# Altium PCB main.PcbDoc
Units mil, origin at the board's own origin, x right, y up, seen from the top; angles counter-clockwise.
Board outline 1186.89 x 856.86 mil, 2 copper layers (Top Layer, Bottom Layer); 16 components, 10 nets, 58 pads, 8 vias.
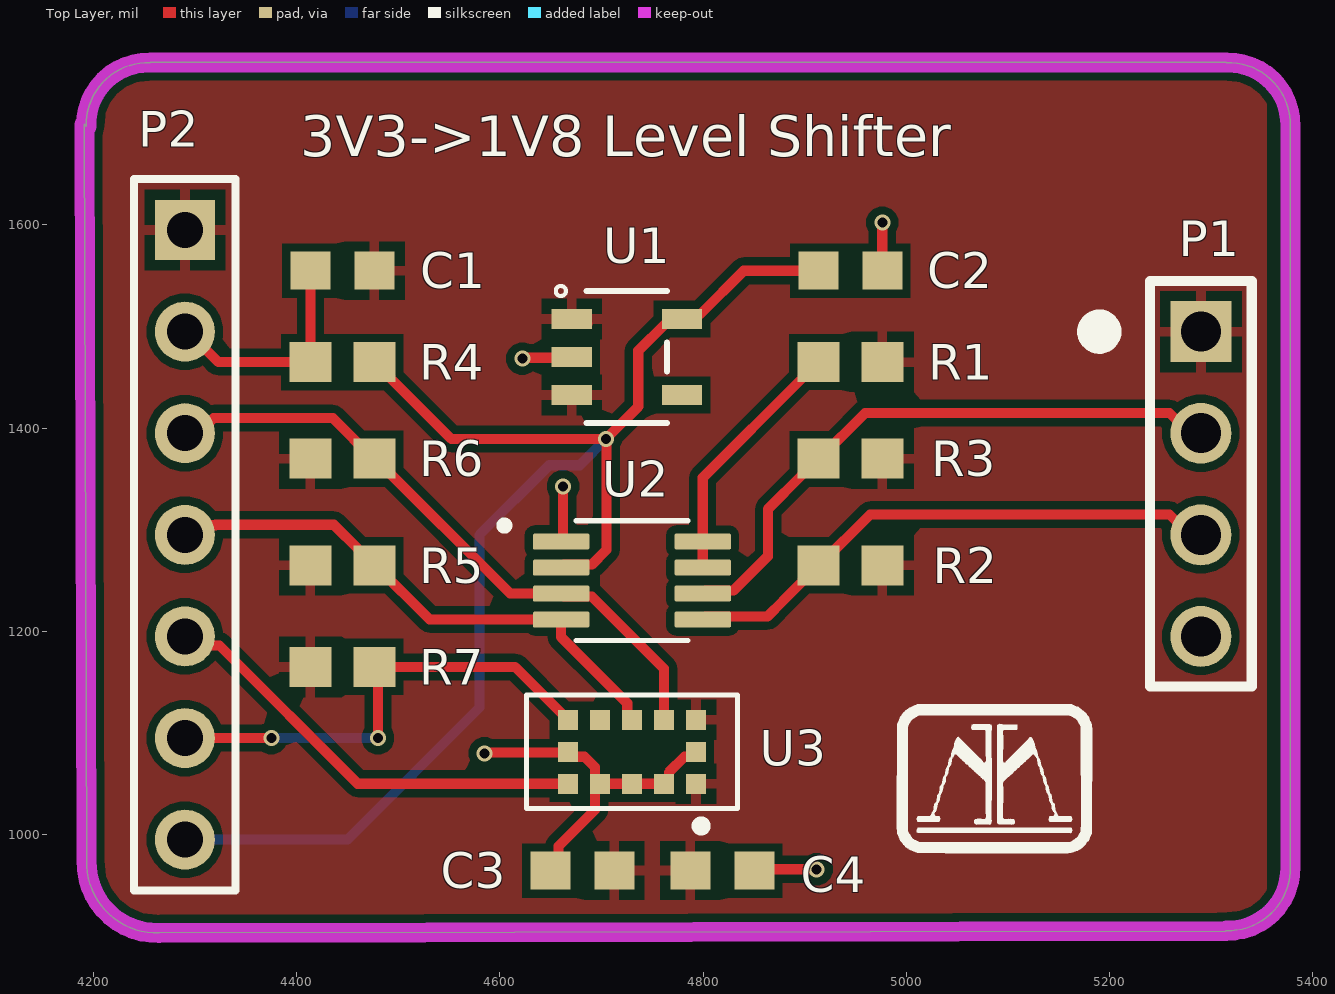
[diagram p0: Top Layer view]
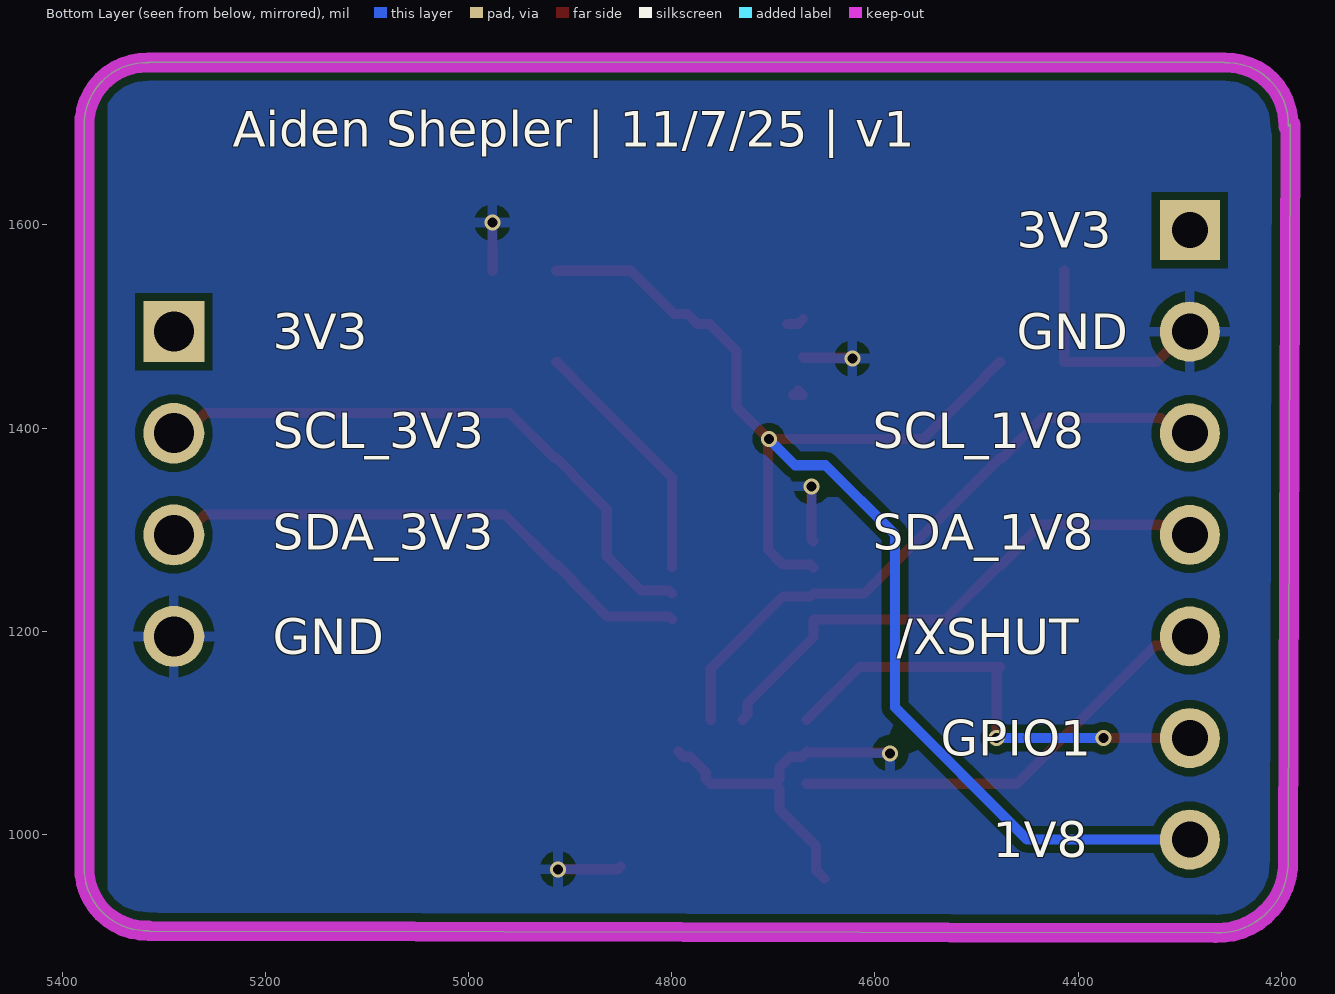
[diagram p1: Bottom Layer view, seen from below]

## Layer stack, top to bottom
Top Solder: solder mask 0.4, Solder Resist, Dk 3.5
Top Layer: signal copper 1.4
Dielectric 1: dielectric 12.6, FR-4, Dk 4.8
Bottom Layer: signal copper 1.4
Bottom Solder: solder mask 0.4, Solder Resist, Dk 3.5

## Board outline
4193.24,974.71 4191.06,1699.06 4192.91,1696.97 cw(c4253.94,1698.82) 4255.9,1759.84 4255.94,1760 5314.8,1760 5315.08,1759.85 cw(c5316.93,1698.82) 5377.95,1696.85 5377.95,968.5 5377.96,968.38 cw(c5316.93,966.54) 5314.96,905.51 5314.45,905 4264.68,903.14 cw(c4262.58,972.47)

## Design rules (kind name [scope] priority, off if disabled: settings)
Clearance [All] p1: gap=7.87 ignorepadtopadclearanceinfootprint=FALSE
HoleSize [All] p1: absolutevalues=TRUE maxlimit=100 minlimit=9.84 maxpercent=80.000 minpercent=20.000
PolygonConnect [All] p1: connectstyle=Relief reliefconductorwidth=10 reliefentries=4 polygonreliefangle="90 Angle" airgapwidth=10
RoutingVias [All] p1: holewidth=28 width=50 viastyle="Through Hole" minholewidth=28 minwidth=50 maxholewidth=28 maxwidth=50
SolderMaskExpansion [All] p1: expansion=4 istentingtop=FALSE
SupplyNets "Schematic Supply Nets_2" [InNet('GND')] p1: voltage=0.000
SupplyNets "Schematic Supply Nets_1" [InNet('3V3')] p2: voltage=0.000
SupplyNets "Schematic Supply Nets" [InNet('1V8')] p3: voltage=0.000
Width [All] p1: maxlimit=10 minlimit=10 preferedwidth=10
29 further rules are at their usual default settings.

## Components (designator, comment, footprint, x,y, rotation, side; value= is the part's Value field where it differs from the comment)
C1 "Cap" CAPC0603 4445,1555 r180 top value=100nF
C2 "Cap" CAPC0603 4945,1555 r0 top value=100nF
C3 "Cap" CAPC0603 4681.1,964.57 r180 top value=100nF
C4 "Cap" CAPC0603 4818.9,964.57 r0 top value=4.7uF
P1 "1x4 0.1in Header" "1x4 0.1in Header" 5290,1495 r0 top
P2 "Header 7" HDR1X7 4290,1595 r270 top
R1 "Res" RES0603 4945,1465 r180 top value=200k
R2 "Res" RES0603 4945,1265 r180 top value=10k
R3 "Res" RES0603 4945,1370 r180 top value=10k
R4 "Res" RES0603 4445,1465 r180 top value=300k
R5 "Res" RES0603 4445,1265 r0 top value=10k
R6 "Res" RES0603 4445,1370 r0 top value=10k
R7 "Res" RES0603 4445,1165 r0 top value=10k
U1 "ADPL40502AUJZ-1.8-R7" TSOT-23-5_UJ-5_ADI 4725,1470 r0 top
U2 "PCA9306DCTR" SOP65P400X130-8N 4730,1250 r0 top
U3 "VL53L1CXV0FY/1" "LGA-12 (VL53L1CXV0FY/1)" 4730,1081.5 r270 top

## Footprints (in the part's own frame and the unit in brackets; to place one, negate y for a bottom-side part, rotate by r counter-clockwise, add the part's x,y. Pads: shape width x height; smd on the part's side, far side on the other; paste and mask are expansions set on the pad)
"1x4 0.1in Header" [mil]
  rect 60x60 hole 39.37: 1(0,0)
  round 60 hole 39.37: 2(0,-100) 3(0,-200) 4(0,-300)
  silkscreen extent -110,-349 50,50
CAPC0603 [mm] "Chip Capacitor, 2-Leads, Body 1.60x0.80mm, IPC Medium Density"
  rect 1x0.95 smd: 1(-0.8,0) 2(0.8,0)
  body extent -0.88,-0.48 0.87,0.48, height 0.8
HDR1X7 [mm] "Connector; Header; 7 Position"
  rect 1.5x1.5 hole 0.9: 1(0,0)
  round 1.5 hole 0.9: 2(2.54,0) 3(5.08,0) 4(7.62,0) 5(10.16,0) 6(12.7,0) 7(15.24,0)
  silkscreen extent -1.27,-1.27 16.51,1.27
"LGA-12 (VL53L1CXV0FY/1)" [mm] "12 pin LGA for 4.9 x 2.5 x 1.56 mm package"
  rect 0.5x0.5 smd: 1(0.8,1.6) 2(0.8,0.8) 3(0.8,0) 4(0.8,-0.8) 5(0.8,-1.6) 6(0,-1.6) 7(-0.8,-1.6) 8(-0.8,-0.8) 9(-0.8,0) 10(-0.8,0.8) 11(-0.8,1.6) 12(0,1.6)
  silkscreen extent -1.42,-2.64 1.97,2.64, body extent -1.25,-2.45 1.25,2.45, height 1.6
RES0603 [mm] "Chip Resistor, 2-Leads, Body 1.60x0.80mm, IPC Medium Density"
  rect 1.05x1 smd: 1(-0.8,0) 2(0.8,0)
  body extent -0.88,-0.48 0.87,0.47, height 0.8
SOP65P400X130-8N [mm]
  rrect25% 1.42x0.4 smd: 1(-1.77,0.975) 2(-1.77,0.325) 3(-1.77,-0.325) 4(-1.77,-0.975) 5(1.77,-0.975) 6(1.77,-0.325) 7(1.77,0.325) 8(1.77,0.975)
  silkscreen extent -3.29,-1.5 1.4,1.5, body extent -2,-1.47 2,1.47, height 1.3
TSOT-23-5_UJ-5_ADI [mil] "SOT23_5, Thin"
  rect 39.5x20 smd paste+0 mask+0: 1(-54.25,37.4) 2(-54.25,0) 3(-54.25,-37.4) 4(54.25,-37.4) 5(54.25,37.4)
  silkscreen extent -70,-65 40,70, body extent -60,-60 60,60, height 39

## Part data
C1 C2 C3 C4: Supplier Part Number 1=1276-1000-1-ND, Supplier 1=Digi-Key
P2: "Header, 7-Pin", LatestRevisionDate=17-Jul-2002, LatestRevisionNote="Re-released for DXP Platform.", Publisher="Altium Limited"
R1 R2 R3 R4 R5 R6 R7: "SMD, RES0603", Supplier Part Number 1=RMCF0603JT10K0CT-ND, Supplier 1=Digi-Key
U1: "Low Noise, 200mA, CMOS Linear Regulator (LDO)", Manufacturer_Name="Analog Devices Inc", Copyright="Copyright (C) 2025 Ultra Librarian. All rights reserved.", Manufacturer_Part_Number=ADPL40502AUJZ-1.8-R7, RefDes=RefDes, Type=Type
U2: "2-bit bidirectional 400-kHz I2C/SMBus voltage level translator", Package="SSOP-8 Texas Instruments", Check_prices=https://www.snapeda.com/parts/PCA9306DCTR/Texas+Instruments/view-part/?ref=eda, MF="Texas Instruments", MP=PCA9306DCTR, SnapEDA_Link=https://www.snapeda.com/parts/PCA9306DCTR/Texas+Instruments/view-part/?ref=snap
U3: "ToF Optical Sensor 157.480 (4m) I²C Output from STMelectronics", Package="LGA-12 STMicroelectronics", Availability="In Stock", Check_prices=https://www.snapeda.com/parts/VL53L1CXV0FY/1/STMicroelectronics/view-part/?ref=eda, MF=STMicroelectronics, MP=VL53L1CXV0FY/1, Price=None, Purchase-URL=https://pricing.snapeda.com/search/part/VL53L1CXV0FY/1/?ref=eda, SnapEDA_Link=https://www.snapeda.com/parts/VL53L1CXV0FY/1/STMicroelectronics/view-part/?ref=snap

## Via types
v1: diameter 15.75, hole 9.84, Top Layer to Bottom Layer, 8 vias

## Nets (pads, with @x,y where several pads share a name; then routed paths per layer and width w, separated by ;. In a path a pad name is that pad's centre, name@x,y a point inside that pad or via, vN(x,y) a via of type N, cw(c..) or ccw(c..) an arc to the next point about the centre after c; other vN are vias at no path point)
1V8: C2.1 P2.7 R4.1 U1.5 U2.2 | length 1408.2
  Top Layer w10: R4.1 4477.48,1465 4492.17,1450.31 4492.17,1449.33 4552.21,1389.29 v1(4704.27,1389.29) ; U2.2 4663.19,1265.67 4690.48,1265.67 4705,1280.19 4705,1388.56 v1(4704.27,1389.29) ; C2.1 4840,1555 4797.4,1512.4 4784.25,1512.4 4774.25,1502.4 4762.44,1502.4 4736.22,1476.19 4736.22,1421.23 v1(4704.27,1389.29)
  Bottom Layer w10: P2.7 4450,995 4580,1125 4580,1295 4648.58,1363.58 4678.56,1363.58 v1(4704.27,1389.29)
3V3: C1.1 C3.1 C4.1 P1.1 P2.1 R1.1 R2.1 R3.1 R5.1 R6.1 R7.1 U1.1 U1.3 U3.1 U3.11 | length 34.4
  Top Layer w10: U1.1 4675.75,1502.4 U1.1@4686.3,1502.4 ; U1.3@4675.75,1437.6 U1.3 U1.3@4680.5,1432.6
GND: C1.2 C2.2 C3.2 C4.2 P1.4 P2.2 R4.2 U1.2 U2.1 U3.2 U3.3 U3.4 U3.6 U3.12 | length 795.2
  Top Layer w10: P2.2 4292.97,1495 4322.97,1465 R4.2 C1.2 ; v1(4585,1080) 4585.75,1080.75 4666.26,1080.75 U3.6 4671.85,1076.65 4683.35,1076.65 4693.66,1066.34 4693.66,1054.84 U3.4 ; v1(4622.05,1468.5) 4622.8,1469.25 4670,1469.25 U1.2 ; C3.2@4649.61,956.69 C3.2@4657.76,964.85 ; C3.2@4657.76,968.79 4657.76,988.47 4693.66,1024.37 4693.66,1045.16 U3.4 ; U2.1 4662.17,1290.24 v1(4662.17,1342.83) ; U3.12 4788.15,1076.65 4781.75,1076.65 4766.34,1061.24 4766.34,1054.84 U3.2 U3.3 U3.4 ; C4.2@4850.39,968.5 4853.07,965.83 v1(4911.77,965.83) ; v1(4976.38,1602.36) 4976.38,1555.12 C2.2
GPIO1: P2.6 R7.2 U3.7 | length 473.5
  Top Layer w10: P2.6 v1(4375,1095) ; v1(4480,1095) 4480,1161.5 R7.2 4615,1165 U3.7
  Bottom Layer w10: v1(4375,1095) v1(4480,1095)
NetR1_2: R1.2 U2.7 U2.8 | length 249.9
  Top Layer w10: U2.7 U2.8 4799.69,1351.18 4897.83,1449.33 4897.83,1450.31 4912.52,1465 R1.2
SCL_1V8: P2.3 R6.2 U2.3 U3.10 | length 630.2
  Top Layer w10: P2.3 4303.27,1395 4318.27,1410 4435.51,1410 4475.51,1370 R6.2 4477.48,1370 4610.28,1237.2 U2.3 4663.19,1234.33 4690.48,1234.33 4761.5,1163.31 U3.10
SCL_3V3: P1.2 R3.2 U2.6 | length 600.6
  Top Layer w10: U2.6 4802.56,1240.08 4829.85,1240.08 4863.77,1274 4863.77,1320.26 4897.83,1354.33 4897.83,1355.31 4912.52,1370 R3.2 4914.49,1370 4959.49,1415 5259.14,1415 5279.64,1394.51 P1.2@5290.49,1394.51
SDA_1V8: P2.4 R5.2 U2.4 U3.9 | length 541.2
  Top Layer w10: P2.4 4299.39,1304.39 4319.77,1304.39 4320.39,1305 4436.5,1305 4460.83,1280.67 4460.83,1279.69 4475.51,1265 R5.2 4477.48,1265 4530.87,1211.61 U2.4 4660.31,1194.29 4725.36,1129.25 4725.36,1117.63 U3.9
SDA_3V3: P1.3 R2.2 U2.5 | length 545
  Top Layer w10: U2.5 4802.56,1214.49 4863.31,1214.49 4879.18,1230.36 4879.18,1230.67 4897.83,1249.33 4897.83,1250.31 4912.52,1265 R2.2 4914.49,1265 4964.49,1315 5259.14,1315 5281.14,1293 P1.3@5292,1293
X\S\H\U\T\: P2.5 U3.5 | length 437.1
  Top Layer w10: P2.5 4298.99,1186.01 4323.99,1186.01 4460,1050 U3.5
pads on no net: U1.4 U3.8

## Polygon pours and split planes (outlines as drawn)
3V3 on Top Layer "3v3" (solid, pour order 1): 4195,905 5355,905 5355,1760 4195,1760
GND on Bottom Layer "GND" (solid, pour order 2): 4195,905 5355,905 5355,1760 4195,1760

## Keep-outs
Keep-Out Layer:
  lines w19.68: 4191.06,1699.06 4193.24,974.71 ccw(c4262.58,972.47) 4264.68,903.14 5314.45,905 ; 4192.91,1696.97 cw(c4253.94,1698.82) 4255.9,1759.84 ; 4255.94,1760 5314.8,1760 ; 5314.96,905.51 ccw(c5316.93,966.54) 5377.96,968.38 ; 5315.08,1759.85 cw(c5316.93,1698.82) 5377.95,1696.85 5377.95,968.5

## Silkscreen, mask and mechanical layers (free items; w line width, h text height)
Top Overlay:
  drawing of 4 lines, arcs and shapes, not listed
  text "3V3->1V8 Level Shifter" at 4403.7,1667.48 h40
Bottom Overlay:
  text "Aiden Shepler | 11/7/25 | v1" at 5232.16,1677.14 h35
  text "3V3" at 4460.5,1577.51 h35
  text "GND" at 4460.5,1477.51 h35
  text "3V3" at 5192.79,1477.51 h35
  text "SCL_1V8" at 4602.24,1380.42 h35
  text "SCL_3V3" at 5192.79,1380.42 h35
  text "SDA_1V8" at 4602.24,1280.42 h35
  text "SDA_3V3" at 5192.79,1280.42 h35
  text "/XSHUT" at 4578.61,1177.51 h35
  text "GND" at 5192.79,1177.51 h35
  text "GPIO1" at 4535.31,1077.51 h35
  text "1V8" at 4484.13,977.51 h35